# Altium PCB PCB1.PcbDoc
Units mm, origin at the board's own origin, x right, y up, seen from the top; angles counter-clockwise.
Board outline 58.5 x 71 mm, 2 copper layers (Top Layer, Bottom Layer); 34 components, 23 nets, 132 pads, 27 vias.
Unrouted connection lines stored in the file: 2.
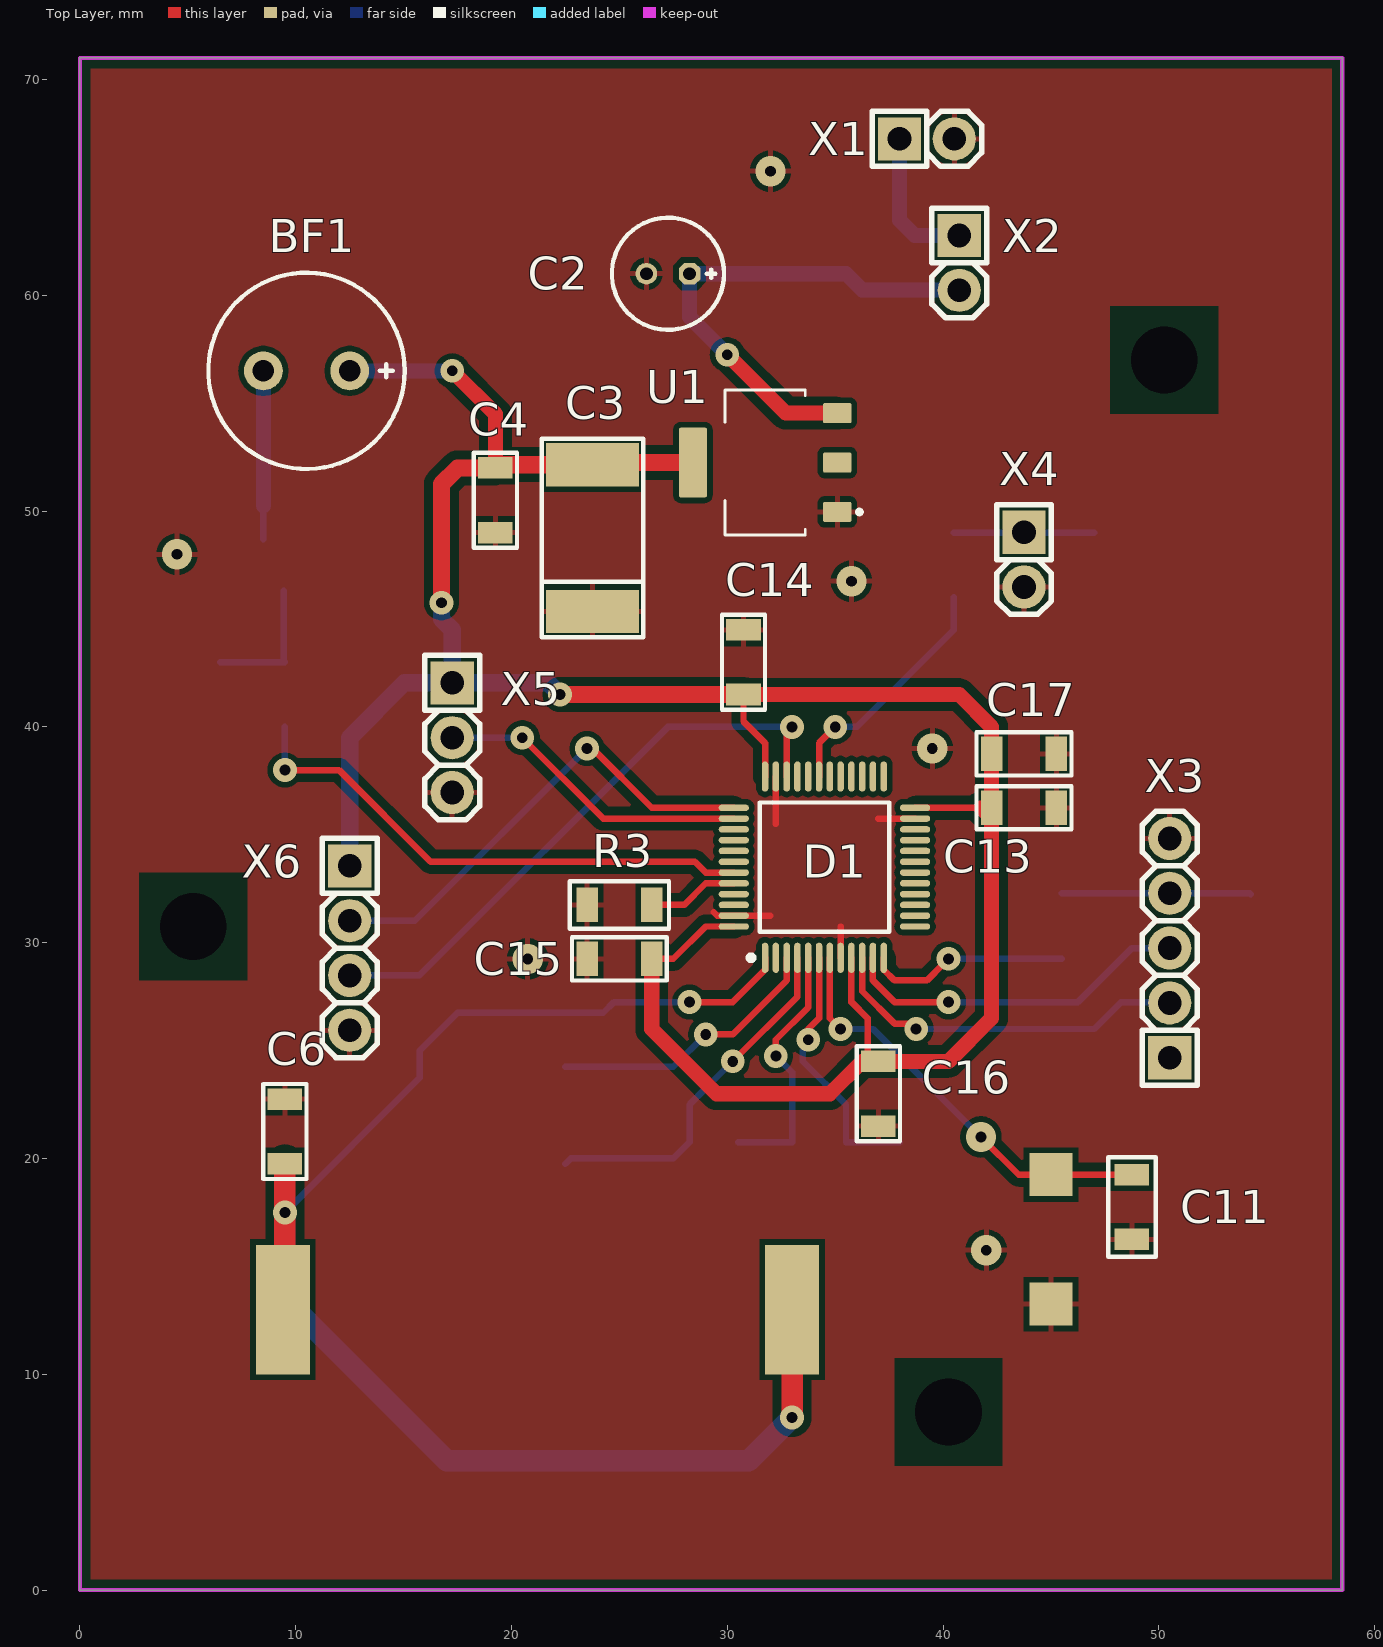
[diagram p0: Top Layer view]
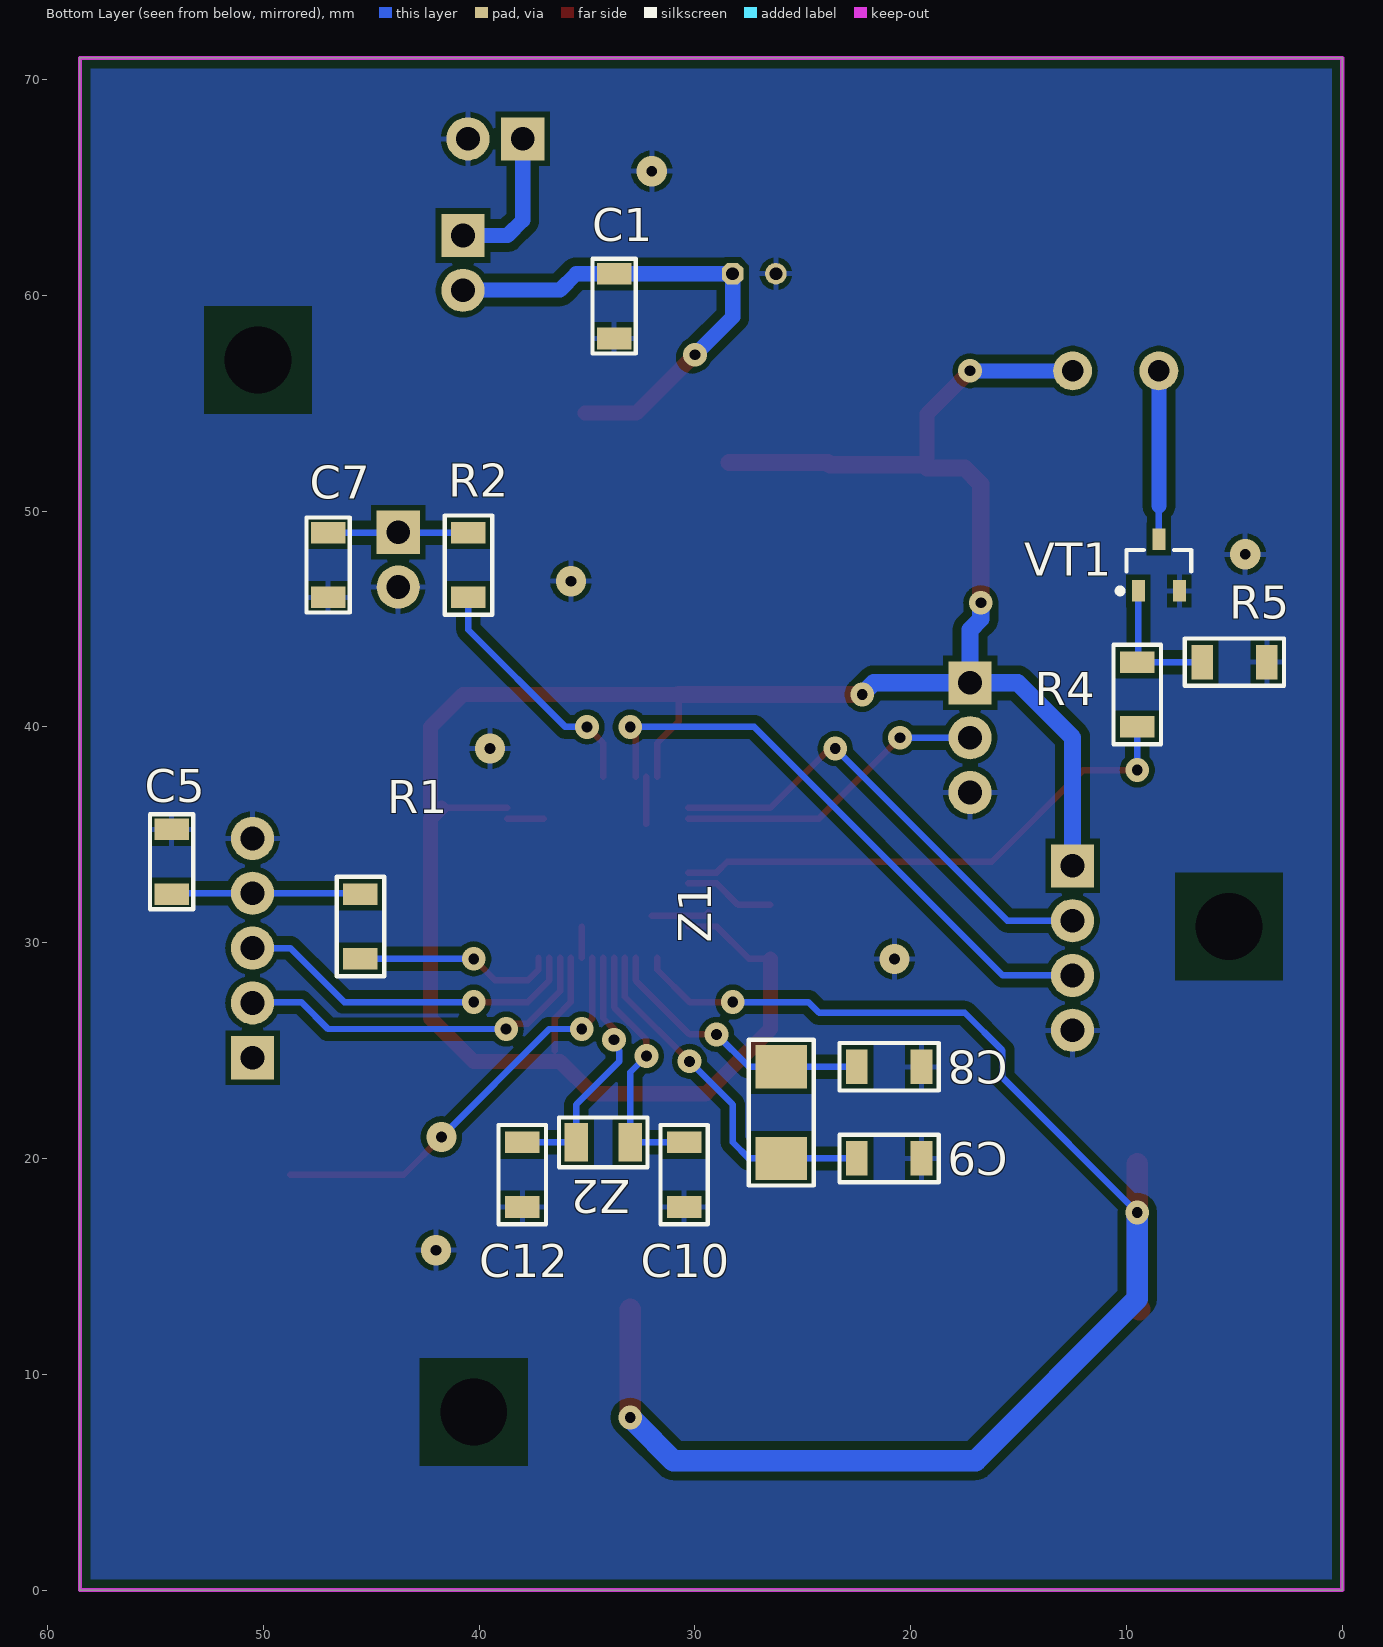
[diagram p1: Bottom Layer view, seen from below]
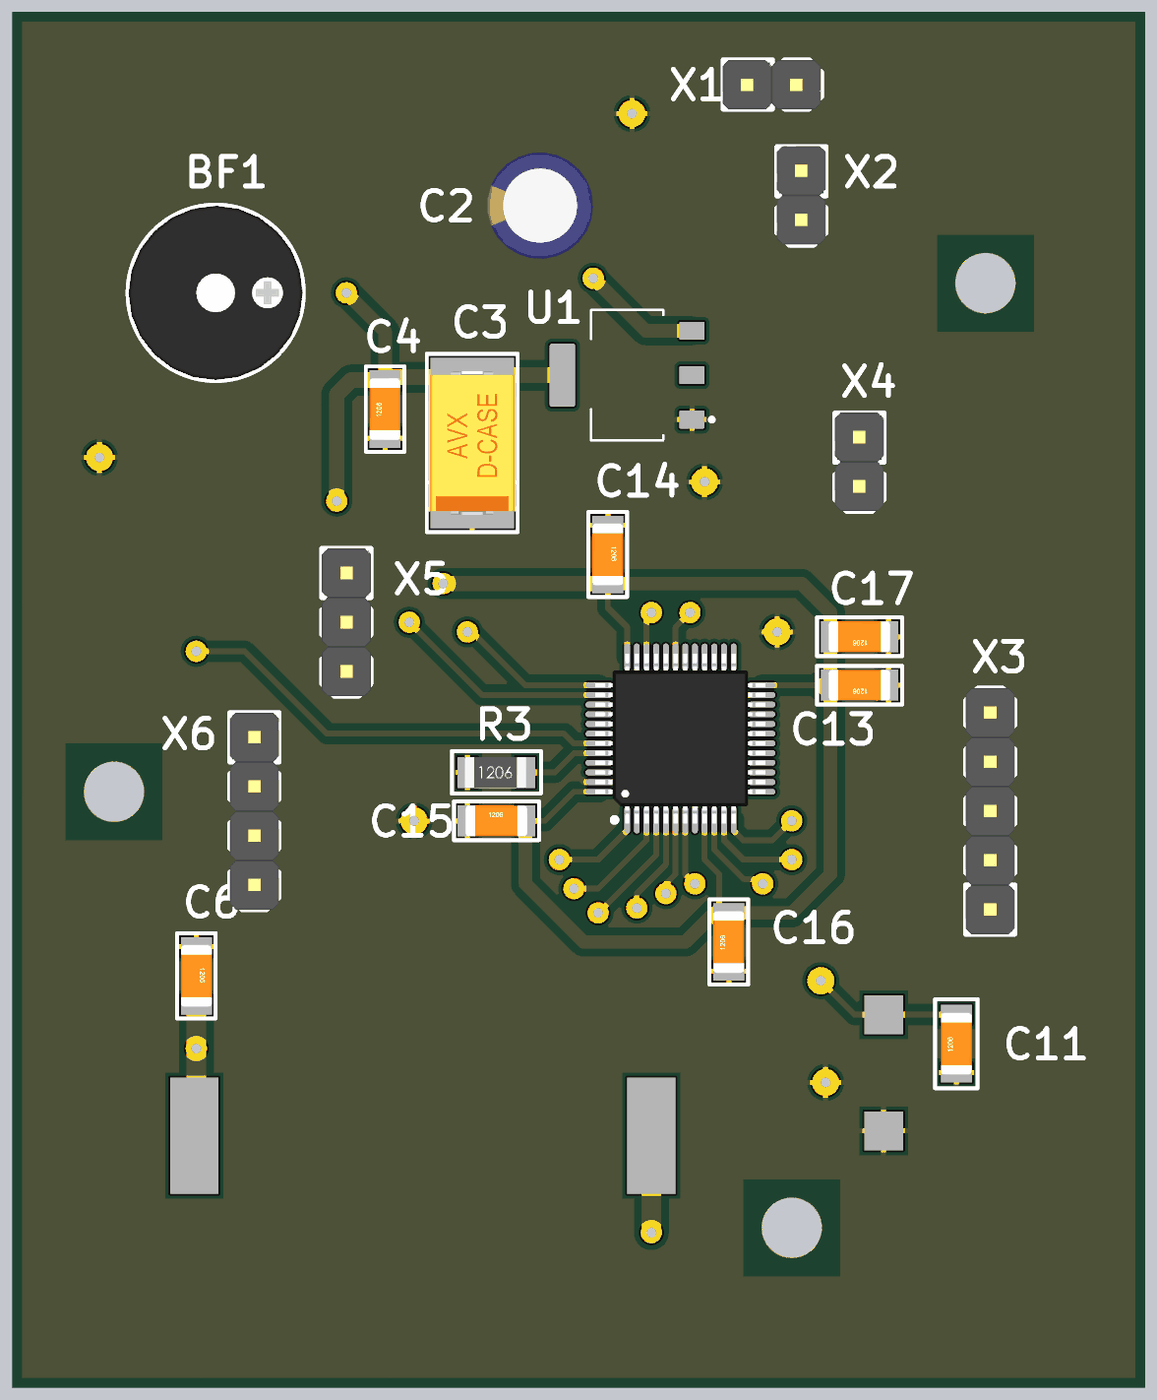
[diagram p2: 3D render of the assembled board from above, using the file's embedded part models]
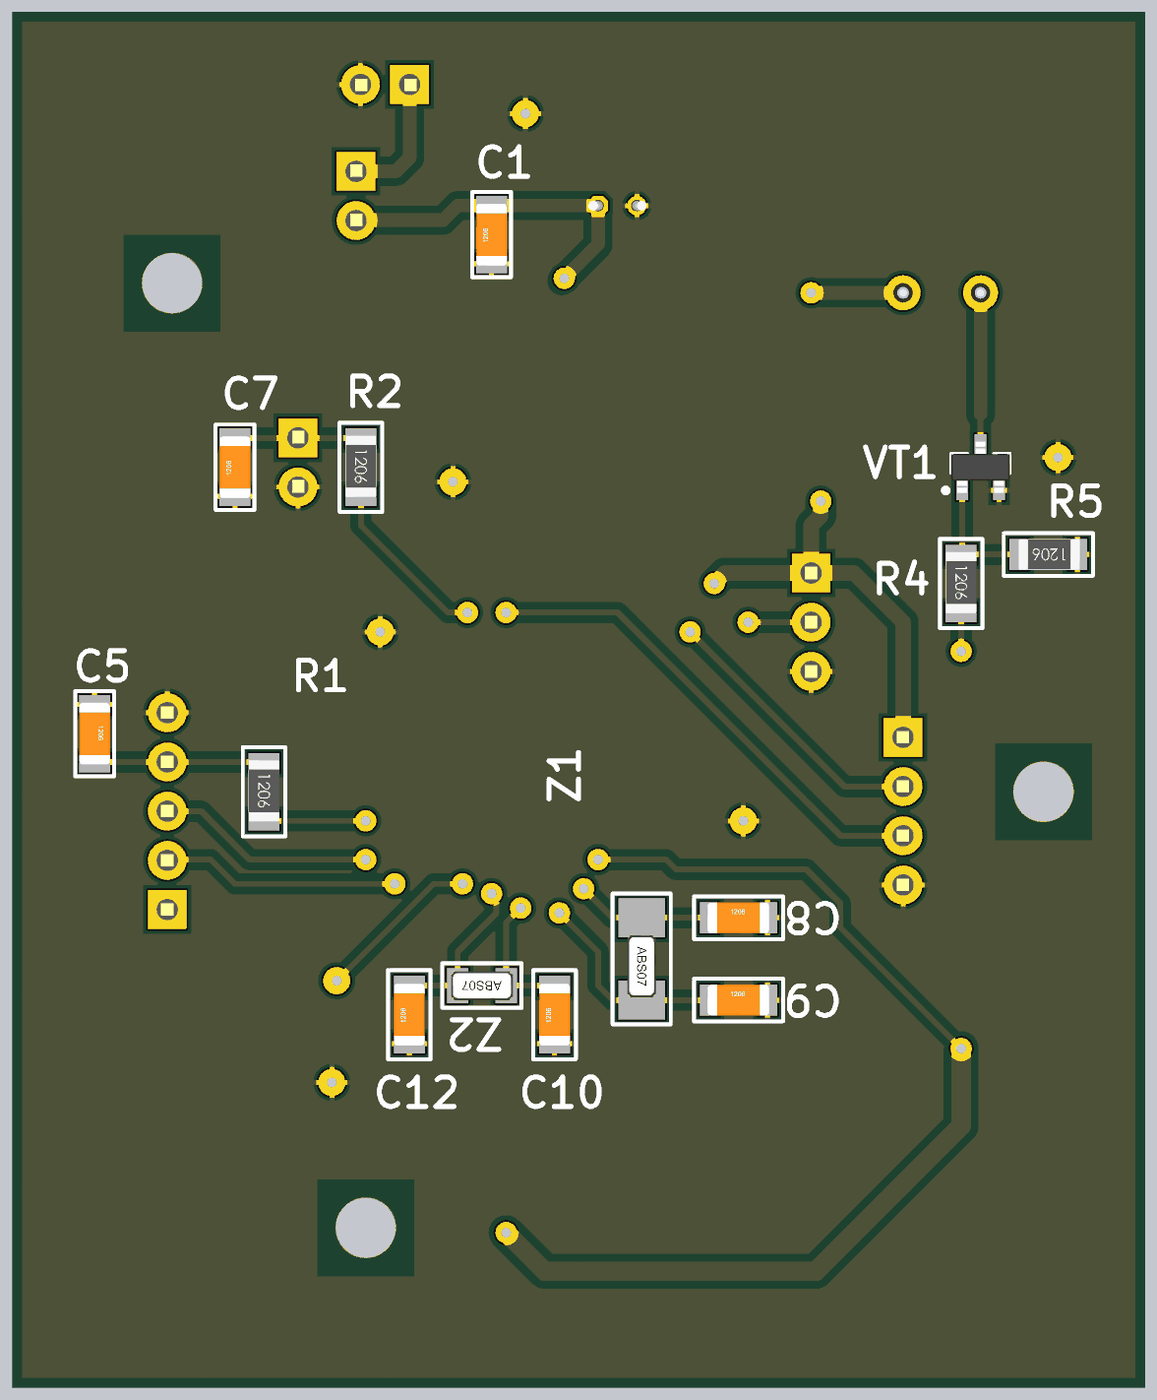
[diagram p3: 3D render of the assembled board from below, using the file's embedded part models]

## Layer stack, top to bottom
Top Solder: solder mask 0.0102, Solder Resist, Dk 3.5
Top Layer: signal copper 0.0356
Dielectric 1: dielectric 0.32, FR-4, Dk 4.8
Bottom Layer: signal copper 0.0356
Bottom Solder: solder mask 0.0102, Solder Resist, Dk 3.5

## Board outline
0,0 0,71 58.5,71 58.5,0

## Design rules (kind name [scope] priority, off if disabled: settings)
Clearance [All] p1: gap=0.254 ignorepadtopadclearanceinfootprint=TRUE except(0: Arc-Hole Track-Hole SMDPad-Hole THPad-Hole Via-Hole Fill-Hole Poly-Hole Region-Hole Text-Hole; 0.4: Arc-Arc Arc-Track Arc-SMDPad Arc-THPad Arc-Via Arc-Fill Arc-Poly Arc-Region Arc-Text Track-Track Track-SMDPad Track-THPad Track-Via Track-Fill Track-Poly Track-Region Track-Text)
PolygonConnect [All] p1: connectstyle=Relief reliefconductorwidth=0.254 reliefentries=4 polygonreliefangle="90 Angle" airgapwidth=0.254
RoutingVias [All] p1: holewidth=0.711 width=1.27 viastyle="Through Hole" minholewidth=0.711 minwidth=1.27 maxholewidth=0.711 maxwidth=1.27
SolderMaskExpansion [All] p1: expansion=0.102
Width [All] p1: maxlimit=2 minlimit=0.254 preferedwidth=0.3
30 further rules are at their usual default settings.

## Classes and differential pairs
component class Sheet1: BF1 C1 C2 C3 C4 C5 C6 C7 C8 C9 C10 C11 C12 C13 C14 C15 C16 C17 D1 R1 R2 R3 R4 R5 U1 VT1 X2 X3 X4 X5 X6 Z2

## Components (designator, comment, footprint, x,y, rotation, side; value= is the part's Value field where it differs from the comment)
BF1 "DIP switch, 2.73 kHz, 3VDC, 80mA, -20...+70°C" "BUZ: AT-0927-TT-6-R" 10.5,56.5 r0 top
C1 "Ceramic capacitor, 0.1uF, X7R, ±10%, 50V, 1206, -55...+125°C" "CAP: 1206" 33.75,59.5 r90 bottom value=0.1uF
C2 "10uF" D5C2H11 27.25,61 r180 top
C3 "Tantalum capacitor, 22μF, 35V, ±20%, 900mOhm, case D (7343), -55...+125°C" "CAP: TANTAL-D" 23.75,48.75 r90 top value=22?F
C4 "Ceramic capacitor, 0.1uF, X7R, ±10%, 50V, 1206, -55...+125°C" "CAP: 1206" 19.25,50.5 r90 top value=0.1uF
C5 "Ceramic capacitor, 0.1uF, X7R, ±10%, 50V, 1206, -55...+125°C" "CAP: 1206" 54.25,33.75 r270 bottom value=0.1uF
C6 "Ceramic capacitor, 0.1uF, X7R, ±10%, 50V, 1206, -55...+125°C" "CAP: 1206" 9.5,21.25 r270 top value=0.1uF
C7 "Ceramic capacitor, 0.1uF, X7R, ±10%, 50V, 1206, -55...+125°C" "CAP: 1206" 47,47.5 r90 bottom value=0.1uF
C8 "15pF" CH1206C 21,24.25 r180 bottom
C9 "15pF" CH1206C 21,20 r180 bottom
C10 "22pF" CH1206C 30.5,19.25 r90 bottom
C11 "0.1uF" CH1206C 48.75,17.75 r90 top
C12 "22pF" CH1206C 38,19.25 r90 bottom
C13 "Ceramic capacitor, 0.1uF, X7R, ±10%, 50V, 1206, -55...+125°C" "CAP: 1206" 43.75,36.25 r180 top value=0.1uF
C14 "Ceramic capacitor, 0.1uF, X7R, ±10%, 50V, 1206, -55...+125°C" "CAP: 1206" 30.75,43 r270 top value=0.1uF
C15 "Ceramic capacitor, 0.1uF, X7R, ±10%, 50V, 1206, -55...+125°C" "CAP: 1206" 25,29.25 r0 top value=0.1uF
C16 "Ceramic capacitor, 0.1uF, X7R, ±10%, 50V, 1206, -55...+125°C" "CAP: 1206" 37,23 r90 top value=0.1uF
C17 "Ceramic capacitor, 4.7uF, X7R, ±10%, 50V, 1206, -55...+125°C" "CAP: 1206" 43.75,38.75 r180 top value=4.7uF
D1 "IC microcontroller, 32-Bit, Cortex-M3, 72MHz, 64KB, 20KB, 2...3.6V, -40...+85°C, 48-LQFP" 48-LQFP 34.5,33.5 r90 top
R1 "1k" CH1206R 45.5,30.75 r270 bottom
R2 "1k" CH1206R 40.5,47.5 r270 bottom
R3 "510" CH1206R 25,31.75 r0 top
R4 "1k" CH1206R 9.5,41.5 r270 bottom
R5 "10k" CH1206R 5,43 r0 bottom
U1 "AMS1117-3.3" SOT229P700X180-4N 31.75,52.25 r90 top (schematic designator U)
VT1 "BC848" SOT23_123 8.5,47.5 r90 bottom (schematic designator VT?)
X1 "Power switch" "CON: PLS-2" 39.25,67.25 r0 top (schematic designator X2)
X2 "Power switch" "CON: PLS-2" 40.75,61.5 r270 top
X3 "JOYSTICK" "CON: PLS-5" 50.5,29.75 r90 top
X4 "BTN_SPEED" "CON: PLS-2" 43.75,47.75 r270 top
X5 "LED PANEL" "CON: PLS-3" 17.25,39.5 r270 top
X6 "SWD" "CON: PLS-4" 12.5,29.75 r270 top
Z1 "8MHz" "OSC: 3215"#1 26,21.75 r270 bottom (schematic designator Z2)
Z2 "8MHz" "OSC: 3215"#2 34.25,20.75 r0 bottom

## Footprints (in the part's own frame and the unit in brackets; to place one, negate y for a bottom-side part, rotate by r counter-clockwise, add the part's x,y. Pads: shape width x height; smd on the part's side, far side on the other; paste and mask are expansions set on the pad)
48-LQFP [mm] "QFP, 48-Leads, Body 7x7mm, Pitch 0.5mm, IPC Medium Density"
  oval 1.4x0.3 smd: 1(-4.2,2.75) 2(-4.2,2.25) 3(-4.2,1.75) 4(-4.2,1.25) 5(-4.2,0.75) 6(-4.2,0.25) 7(-4.2,-0.25) 8(-4.2,-0.75) 9(-4.2,-1.25) 10(-4.2,-1.75) 11(-4.2,-2.25) 12(-4.2,-2.75) 25(4.2,-2.75) 26(4.2,-2.25) 27(4.2,-1.75) 28(4.2,-1.25) 29(4.2,-0.75) 30(4.2,-0.25) 31(4.2,0.25) 32(4.2,0.75) 33(4.2,1.25) 34(4.2,1.75) 35(4.2,2.25) 36(4.2,2.75)
  oval 0.3x1.4 smd: 13(-2.75,-4.2) 14(-2.25,-4.2) 15(-1.75,-4.2) 16(-1.25,-4.2) 17(-0.75,-4.2) 18(-0.25,-4.2) 19(0.25,-4.2) 20(0.75,-4.2) 21(1.25,-4.2) 22(1.75,-4.2) 23(2.25,-4.2) 24(2.75,-4.2) 37(2.75,4.2) 38(2.25,4.2) 39(1.75,4.2) 40(1.25,4.2) 41(0.75,4.2) 42(0.25,4.2) 43(-0.25,4.2) 44(-0.75,4.2) 45(-1.25,4.2) 46(-1.75,4.2) 47(-2.25,4.2) 48(-2.75,4.2)
  round 0.5 on Mech1: ""(-4,4)
  silkscreen extent -4.32,-3 3,3.52, body extent -4.39,-4.39 4.39,4.39, height 1.55
"BUZ: AT-0927-TT-6-R" [mm]
  round 1.8 hole 1: 1(2,0) 2(-2,0)
  silkscreen extent -4.55,-4.55 4.55,4.55, body extent -4.5,-4.5 4.5,4.5, height 4.52
"CAP: 1206" [mm]
  rect 1x1.6 smd: 1(-1.5,0) 2(1.5,0)
  silkscreen extent -2.2,-1 2.2,1, body extent -1.6,-0.8 1.6,0.8, height 1
"CAP: TANTAL-D" [mm]
  rect 2x4.3 smd: 1(-3.4,0) 2(3.4,0)
  silkscreen extent -4.6,-2.35 4.6,2.35, body extent -3.7,-2.22 3.7,2.23, height 3.01
CH1206C [mm] "Non polar chip capacitor, size 1206"
  rect 1x1.6 smd: 1(-1.5,0) 2(1.5,0)
  silkscreen extent -2.3,-1.1 2.3,1.1, body extent -1.6,-0.8 1.6,0.8, height 1
CH1206R [mm] "Chip Resistor, 2-Leads, Body 3,0x1,5mm, IPC Low Density"
  rect 1x1.6 smd: 1(-1.5,0) 2(1.5,0)
  silkscreen extent -2.3,-1.1 2.3,1.1, body extent -1.65,-0.8 1.55,0.8, height 0.47
"CON: PLS-2" [mm]
  rect 2x2 hole 1.1: 1(-1.27,0)
  round 2 hole 1.1: 2(1.27,0)
  silkscreen extent -2.54,-1.27 2.54,1.27, body extent -2.57,-1.28 2.51,1.26, height 8.54
"CON: PLS-3" [mm]
  rect 2x2 hole 1.1: 1(-2.54,0)
  round 2 hole 1.1: 2(0,0) 3(2.54,0)
  silkscreen extent -3.81,-1.27 3.81,1.27, body extent -3.81,-1.27 3.81,1.27, height 8.54
"CON: PLS-4" [mm] "PLS-40 4 pin header"
  rect 2x2 hole 1.1: 1(-3.81,0)
  round 2 hole 1.1: 2(-1.27,0) 3(1.27,0) 4(3.81,0)
  silkscreen extent -5.08,-1.27 5.08,1.27, body extent -5.08,-1.27 5.08,1.27, height 8.54
"CON: PLS-5" [mm]
  rect 2x2 hole 1.1: 1(-5.08,0)
  round 2 hole 1.1: 2(-2.54,0) 3(0,0) 4(2.54,0) 5(5.08,0)
  silkscreen extent -6.35,-1.27 6.35,1.27, body extent -6.35,-1.27 6.35,1.27, height 8.54
D5C2H11 [mm] "Polar capacitor, diameter 5 mm, leads clearance 2 mm, height 11 mm"
  oct 1x1 hole 0.6: 1(-1,0)
  round 1 hole 0.6: 2(1,0)
  silkscreen extent -2.6,-2.6 2.6,2.6, body extent -2.75,-2.75 2.75,2.75, height 13.5
"OSC: 3215"#1 [mm]
  rect 2x2.4 smd: 1(-2.5,0) 3(1.75,0)
  silkscreen extent -3.75,-1.5 3,1.5, body extent -1.61,-0.76 1.61,0.76, height 0.91
"OSC: 3215"#2 [mm]
  rect 1.1x1.8 smd: 1(-1.25,0) 3(1.25,0)
  silkscreen extent -2.05,-1.15 2.05,1.15, body extent -1.61,-0.76 1.61,0.76, height 0.91
SOT23_123 [mm] "SOT23, 3-Leads, Body 3,0x2,6mm (max), Pitch 0,95mm, IPC Medium Density"
  rect 1x0.6 smd: 1(-1.2,0.95) 2(1.2,0) 3(-1.2,-0.95)
  round 0.5 on Mech1: ""(-0.9,1.1)
  silkscreen extent -1.32,-1.5 0.7,1.92, body extent -1.32,-1.52 1.32,1.52, height 1.12
SOT229P700X180-4N [mm]
  rrect15% 0.93x1.31 smd: 1(-2.29,-3.345) 2(0,-3.345) 3(2.29,-3.345)
  rrect15% 3.24x1.31 smd: 4(0,3.345)
  silkscreen extent -3.36,-4.47 3.36,1.86

## Part data
BF1: library part Buzzer, CurrentMax=80mA, Frequency="2.73 kHz", Manufacturer="PUI Audio", PartNumber=AT-0927-TT-6-R, Temperature=-20...+70°C, VoltageMax=3VDC, HelpURL=https://www.digikey.com/products/en?keywords=AT-0927-TT-6-R, TypeBuzzer="DIP switch", ValueManufacturerPartNumber="DIP switch, 2.73 kHz, 3VDC, 80mA, -20...+70°C"
C1 C4 C5 C6 C7 C13 C14 C15 C16 C17: library part Ceramic_1206, Manufacturer=Yageo, Package=1206, PartNumber=CC1206KRX7R9BB104, Temperature=-55...+125°C, Tolerance=±10%, TypeCapacitor="Ceramic capacitor", TypeDielectric=X7R, Voltage=50V, HelpURL=https://www.digikey.com/product-detail/en/yageo/CC1206KRX7R9BB104/311-1179-1-ND/303089
  C1 C4 C5 C6 C7 C13 C14 C15 C16: ValueManufacturerPartNumber="Ceramic capacitor, 0.1uF, X7R, ±10%, 50V, 1206, -55...+125°C"
  C17: ValueManufacturerPartNumber="Ceramic capacitor, 4.7uF, X7R, ±10%, 50V, 1206, -55...+125°C"
C2: library part AlumCap
C3: library part Tantal_D, Manufacturer=AVX, Package="case D (7343)", PartNumber=TAJD476M035RNJV, Temperature=-55...+125°C, Tolerance=±20%, TypeCapacitor="Tantalum capacitor", TypeDielectric=X7R, ValueManufacturerPartNumber="Tantalum capacitor, 22?F, 35V, ±20%, 900mOhm, case D (7343), -55...+125°C", Voltage=35V, HelpURL=https://www.digikey.com/product-detail/en/avx-corporation/TAJD476M035RNJV/478-12122-1-ND/8605695, Impedance=900mOhm
C8 C9 C10 C11 C12: library part Capacitor
D1: library part STM32F103C8T6, "Cortex-M3", Manufacturer=STMicroelectronics, Package=48-LQFP, Temperature=-40...+85°C, ComponentType="IC microcontroller", CoreProcessor=Cortex-M3, CoreSize=32-Bit, HelpURL=https://www.digikey.com/product-detail/en/stmicroelectronics/STM32F103C8T6TR/497-17666-1-ND/7804402, MemoryRAM=20KB, MemoryROM=64KB, PartNumber=STM32F103C8T6, Speed=72MHz, Supply=2...3.6V, ValueManufacturerPartNumber="IC microcontroller, 32-Bit, Cortex-M3, 72MHz, 64KB, 20KB, 2...3.6V, -40...+85°C, 48-LQFP"
R1 R2 R3 R4 R5: library part Resistor
U1: "Sot223/Pkg 1-Amp 3.3-Volt Low Drop Out Voltage Regulatator", Package=None, Availability=Unavailable, MF="Advanced Monolithic Systems", MP=AMS1117-3.3, Price=None, SnapEDA_Link=https://www.snapeda.com/parts/AMS1117-3.3/Advanced%20Monolithic%20Systems/view-part/53450/?ref=snap
VT1: library part NPN, "Bipolar"
X1 X2 X4: library part 2-Connector
X3: library part 5-Connector
X5: library part 3-Connector
X6: library part 4-Connector
Z1 Z2: library part Oscillator

## Free pads (board coordinates)
  rect 2x2 smd: 6(45,19.25) 7(45,13.25)
  rect 2.5x6 smd: 22(9.4,13) 23(33,13)
  rect 1.5x1.5 hole 3.1: 24(50.25,57) 25(5.25,30.75) 26(40.25,8.25)

## Via types
v1: diameter 1.1, hole 0.5, Top Layer to Bottom Layer, 20 vias
v2: diameter 1.4, hole 0.5, Top Layer to Bottom Layer, 7 vias

## Nets (pads, with @x,y where several pads share a name; then routed paths per layer and width w, separated by ;. In a path a pad name is that pad's centre, name@x,y a point inside that pad or via, vN(x,y) a via of type N, cw(c..) or ccw(c..) an arc to the next point about the centre after c; other vN are vias at no path point)
+5V: X1.1 X2.1 | length 6.8
  Bottom Layer w0.7: X1.1 37.98,63.476 38.686,62.77 X2.1
BOOT: D1.44 R3.2 | length 4.2
  Top Layer w0.3: R3.2 28,31.75 29,32.75 D1.44
BTN_SPEED: D1.31 R2.2 | length 11.7
  Top Layer w0.3: D1.31 34.25,39.25 v1(35,40)
  Bottom Layer w0.3: v1@35,40.25 v1(35,40) 36,40 40.5,44.5 R2.2
BUZZER: D1.43 R4.2 | length 24.8
  Top Layer w0.3: v1(9.5,38) 12,38 16.25,33.75 28.5,33.75 29,33.25 D1.43
  Bottom Layer w0.3: v1(9.5,38) R4.2
GND: C1.1 C2.2 C3.1 C4.1 C5.1 C6.1 C7.1 C8.2 C9.2 C10.1 C11.1 C12.1 C13.1 C14.1 C15.1 C16.1 C17.1 D1.8 D1.23 D1.35 D1.47 pad.7 R3.1 R5.1 U1.1 VT1.3 X1.2 X3.5 X4.2 X5.3 X6.4 | length 8
  Top Layer w0.3: 29.376,31.405 29.531,31.25 D1.47 32,31.25 ; 32.25,35.5 D1.35 ; D1.8 35.25,30.75 ; 37,35.75 D1.23
  other v2: 42,15.75 20.75,29.25 39.5,39 35.75,46.75 4.5,48 32,65.75
JS_BTN: D1.12 R1.2 | length 9.3
  Top Layer w0.3: D1.12 37.25,28.75 37.75,28.25 39.25,28.25 40,29 v1@40,29.25
  Bottom Layer w0.3: v1(40.25,29.25) R1.2
JS_X: D1.10 X3.2 | length 17.2
  Top Layer w0.3: D1.10 36.25,27.75 37.75,26.25 38.75,26.25 v1(38.75,26)
  Bottom Layer w0.3: v1(38.75,26) 47,26 48.25,27.25 50.46,27.25 X3.2
JS_Y: D1.11 X3.3 | length 16.1
  Top Layer w0.3: D1.11 36.75,28.25 37.75,27.25 39.75,27.25 v1@40,27.5
  Bottom Layer w0.3: v1(40.25,27.25) 46.25,27.25 48.75,29.75 X3.3
LED_OUT: D1.38 X5.2 | length 14.6
  Top Layer w0.3: v1(20.5,39.5) 24.25,35.75 D1.38
  Bottom Layer w0.3: X5.2 v1(20.5,39.5)
NetBF1_2: BF1.2 VT1.2 | length 9.8
  Bottom Layer w0.3: VT1.2 8.5,50.25 8.5,52.25
  Bottom Layer w0.7: 8.5,50.25 BF1.2
NetC1_2: C1.2 C2.1 U1.3 X2.2 | length 23.7
  Top Layer w0.7: v1(30,57.25) 32.71,54.54 U1.3
  Bottom Layer w0.7: v1@30.125,57.125 28.25,59 C2.1 C1.2 35.5,61 36.25,60.25 X2.2@40.75,60.25
NetC5_2: C5.2 R1.1 X3.4 | length 8.8
  Top Layer w0.3: X3.4 X3.4@50.54,32.25
  Bottom Layer w0.3: R1.1@45.5,32.29 X3.4 54.21,32.29 C5.2
NetC7_2: C7.2 R2.1 X4.1 | length 6.5
  Bottom Layer w0.3: R2.1 43.73,49 X4.1 43.77,49 C7.2
NetC10_2: C10.2 D1.5 Z2.1 | length 12
  Top Layer w0.3: v1(32.25,24.75) 32.25,25.5 33.75,27 D1.5
  Bottom Layer w0.3: C10.2 Z2.1 33,24 v1(32.25,24.75)
NetC12_2: C12.2 D1.6 Z2.3 | length 12.2
  Top Layer w0.3: v1(33.75,25.5) 33.75,26 34.25,26.5 D1.6
  Bottom Layer w0.3: v1(33.75,25.5) 33.75,25.25 33.5,25 33.5,24.5 35.5,22.5 Z2.3 C12.2
NetR4_1: R4.1 R5.2 VT1.1 | length 6.3
  Bottom Layer w0.3: R5.2 R4.1 9.45,43.05 VT1.1
OSC32_IN: C8.1 D1.3 Z1.1 | length 13
  Top Layer w0.3: v1(29,25.75) 30.25,25.75 32.75,28.25 D1.3
  Bottom Layer w0.3: C8.1 Z1.1 27.5,24.25 v1(29,25.75)
OSC32_OUT: C9.1 D1.4 Z1.3 | length 16.8
  Top Layer w0.3: v1(30.25,24.5) 33.25,27.5 D1.4
  Bottom Layer w0.3: C9.1@22.5,19.75 22.75,20 Z1.3 27.5,20 28.25,20.75 28.25,22.5 v1(30.25,24.5)
RST: C11.2 D1.7 pad.6 | length 19.8
  Top Layer w0.3: D1.7 34.75,26.5 v1(35.25,26) ; v2(41.75,21) 43.5,19.25 pad.6 C11.2
  Bottom Layer w0.3: v1(35.25,26) 36.75,26 v2(41.75,21)
SWCLK: D1.37 X6.2 | length 22.2
  Top Layer w0.3: v1(23.5,39) 23.75,39 26.5,36.25 D1.37
  Bottom Layer w0.3: X6.2 15.52,31.02 v1(23.5,39)
SWDIO: D1.34 X6.3 | length 27.7
  Top Layer w0.3: D1.34 32.75,39.75 v1(33,40)
  Bottom Layer w0.3: X6.3 15.73,28.48 27.25,40 v1(33,40)
VBAT: C6.2 D1.1 pad.22 pad.23 | length 71.4
  Top Layer w0.3: v1(28.25,27.25) 30.25,27.25 31.75,28.75 D1.1
  Top Layer w1: pad.22 9.5,13.1 v1(9.5,17.5) C6.2 ; v1(33,8) pad.23
  Bottom Layer w0.3: v1(9.5,17.5) 15.75,23.75 15.75,25 17.5,26.75 24.25,26.75 24.75,27.25 v1(28.25,27.25)
  Bottom Layer w1: v1(9.5,17.5) 9.5,13.5 17,6 31,6 32.75,7.75 v1(33,8)
VDD: BF1.1 C3.2 C4.2 C13.2 C14.2 C15.2 C16.2 C17.2 D1.9 D1.24 D1.36 D1.48 U1.2 U1.4 X3.1 X5.1 X6.1 | length 121.3
  Top Layer w0.3: C15.2 27.5,29.25 29,30.75 D1.48 ; C14.2 30.75,40.25 31.75,39.25 D1.36 ; D1.9 35.75,27.25 36.5,26.5 36.5,25 ; D1.24 41.75,36.25 C13.2
  Top Layer w0.4: C4.2 C4.2@19.4,52.15 ; C3.2 C3.2@23.85,52.25
  Top Layer w0.7: v1(17.25,56.5) 19.25,54.5 C4.2 ; C15.2 26.5,26 29.5,23 34.75,23 36.25,24.5 40.25,24.5 42.25,26.5 42.25,35.75 C13.2@41.75,36.25 ; C14.2 40.75,41.5 42.25,40 C17.2 C13.2
  Top Layer w0.8: v1(16.75,45.75) 16.75,51.25 17.5,52 C4.2 ; C4.2@19.4,52.15 C3.2 ; v1(22.25,41.5) C14.2 ; C3.2@23.85,52.25 U1.4
  Bottom Layer w0.7: BF1.1 v1(17.25,56.5)
  Bottom Layer w0.8: X6.1 12.5,39.5 15.04,42.04 X5.1 ; v1(16.75,45.75) 16.75,45.25 16.75,45 17.25,44.5 X5.1 ; v1(22.25,41.5) 21.71,42.04 X5.1
pads on no net: D1. D1.2 D1.13 D1.14 D1.15 D1.16 D1.17 D1.18 D1.19 D1.20 D1.21 D1.22 D1.25 D1.26 D1.27 D1.28 D1.29 D1.30 D1.32 D1.33 D1.39 D1.40 D1.41 D1.42 D1.45 D1.46 VT1.

## Polygon pours and split planes (outlines as drawn)
GND on Top Layer "TL" (solid, pour order 0): 58.5,71 58.5,0 0,0 0,71
GND on Bottom Layer "BL" (solid, pour order 2): 58.5,71 58.5,0 0,0 0,71

## Keep-outs
Keep-Out Layer:
  the board outline again, w0.2

## Other copper
Top Layer:
  pour cut-out: 52.75,59.5 52.75,54.5 47.75,54.5 47.75,59.5
  pour cut-out: 7.75,33.25 7.75,28.25 2.75,28.25 2.75,33.25
  pour cut-out: 42.75,10.75 42.75,5.75 37.75,5.75 37.75,10.75
Bottom Layer:
  pour cut-out: 42.75,10.75 42.75,5.75 37.75,5.75 37.75,10.75
  pour cut-out: 52.75,59.5 52.75,54.5 47.75,54.5 47.75,59.5
  pour cut-out: 7.75,33.25 7.75,28.25 2.75,28.25 2.75,33.25

## Silkscreen, mask and mechanical layers (free items; w line width, h text height)
Top Assy:
  circle w0.254: c21.25,12.75 r10
Size:
  lines w0.254: -0.004,-3.34 -0.004,-2.832 ; 1.52,-3.594 -0.004,-3.086 ; 1.52,-2.578 -0.004,-3.086 ; 22.746,-3.086 -0.004,-3.086 ; 35.747,-3.086 58.496,-3.086 ; 56.972,-3.594 58.496,-3.086 ; 56.972,-2.578 58.496,-3.086 ; 58.496,-3.34 58.496,-2.832 ; 62.492,1.297 63,-0.227 ; 62.492,69.249 63,70.773 ; 62.746,-0.227 63.254,-0.227 ; 62.746,70.773 63.254,70.773 ; 63,30.296 63,-0.227 ; 63,40.25 63,70.773 ; 63.508,1.297 63,-0.227 ; 63.508,69.249 63,70.773
  text "71 (mm)" at 63.914,30.55 h1.52 r90
  text "58.5 (mm)" at 23,-4 h1.52